# Altium PCB TactSwitch_PCB.PcbDoc
Units mm, origin at the board's own origin, x right, y up, seen from the top; angles counter-clockwise.
Board outline 18.5 x 44.9 mm, 2 copper layers (Top Layer, Bottom Layer), stack 1.571 mm thick; 4 components, 3 nets, 17 pads, 0 vias.
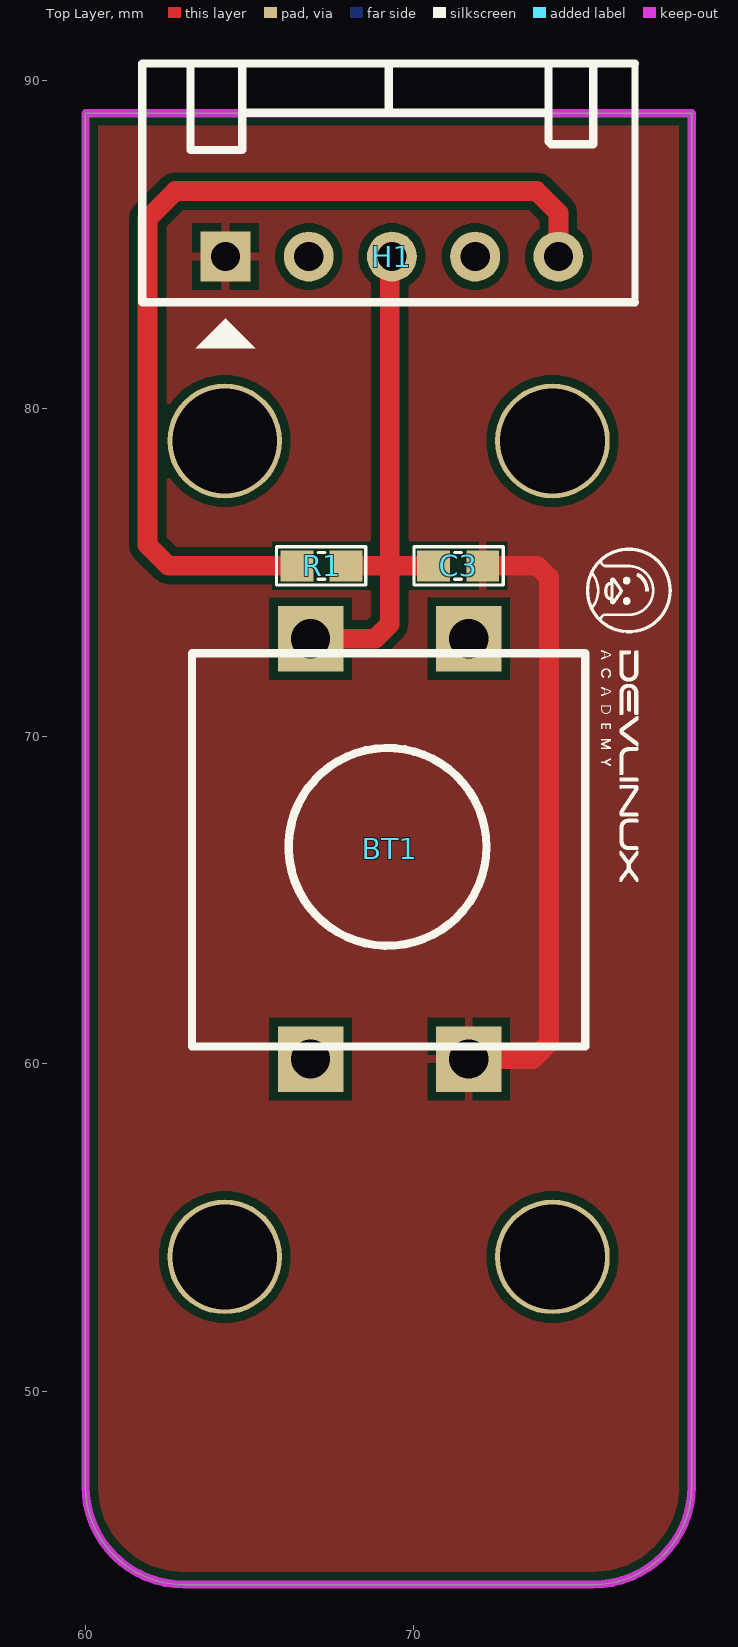
[diagram p0: Top Layer view]
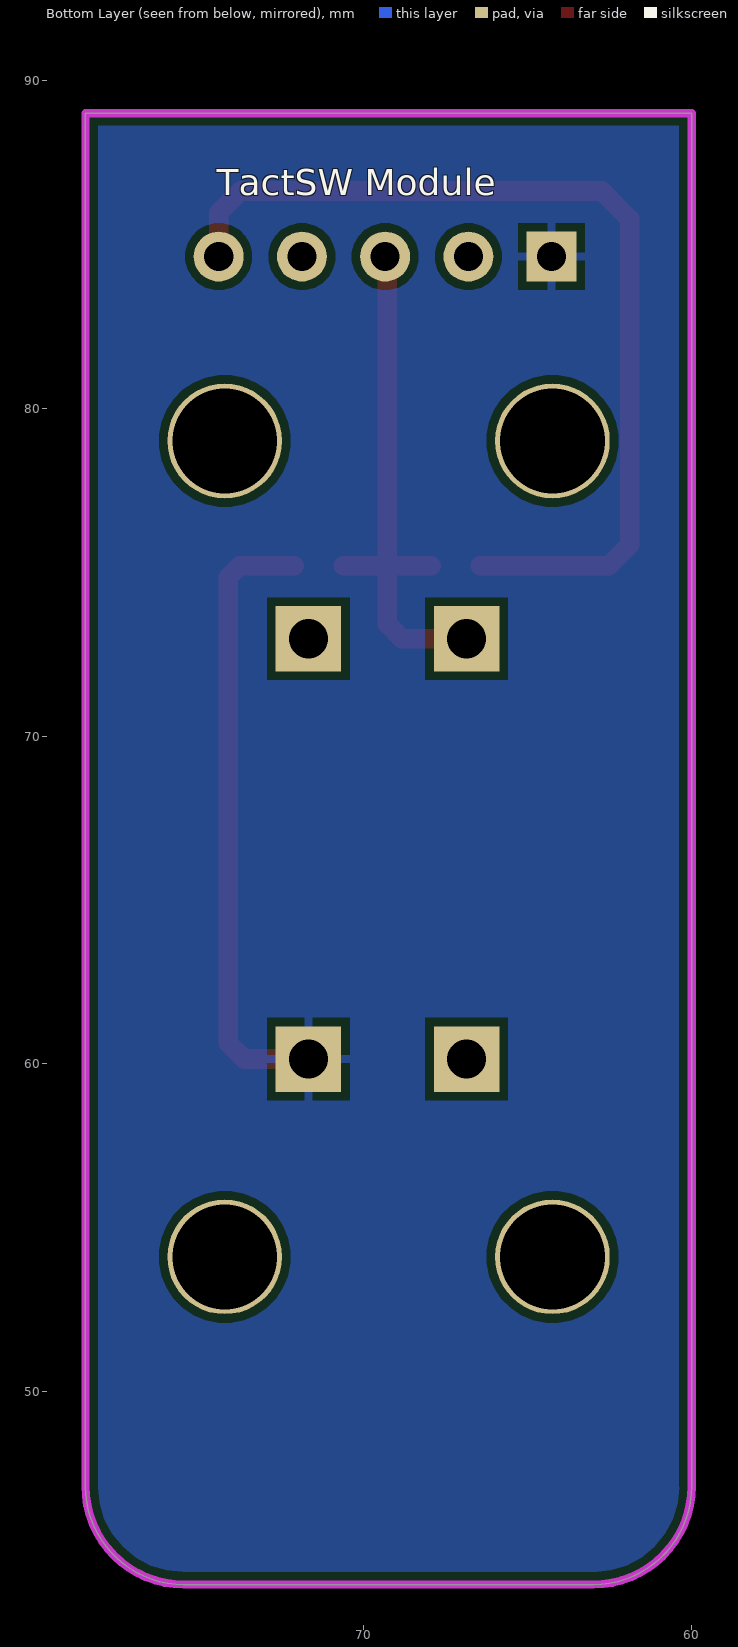
[diagram p1: Bottom Layer view, seen from below]
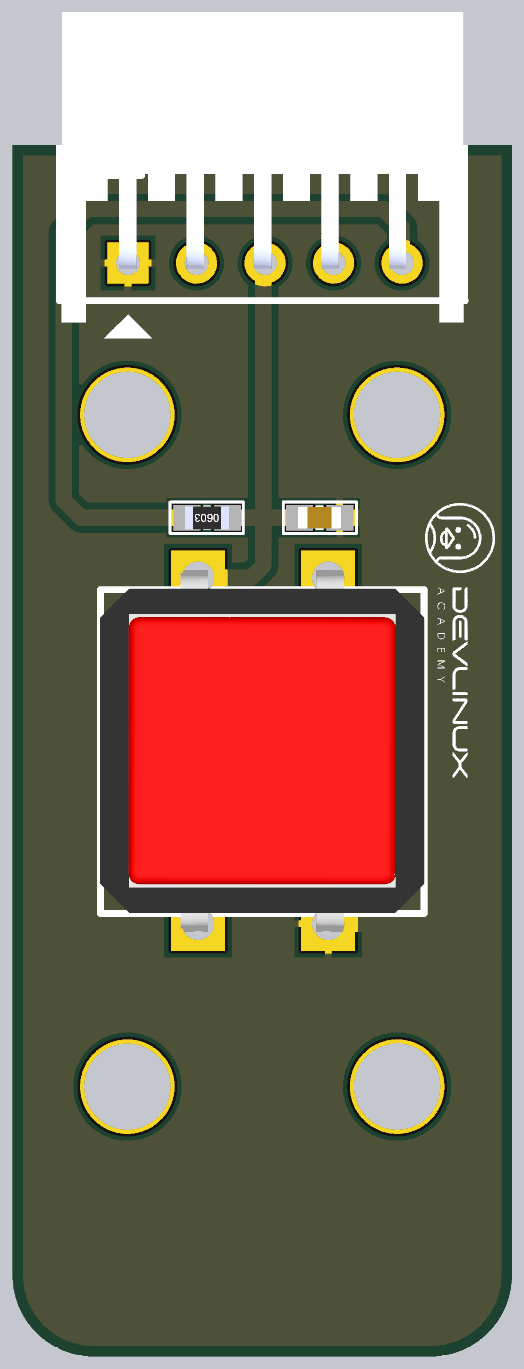
[diagram p2: 3D render of the assembled board from above, using the file's embedded part models]

## Layer stack, top to bottom
Top Solder: solder mask 0.0102, Solder Resist, Dk 3.5
Top Layer: signal copper 0.0356
Dielectric 1: dielectric 1.5, FR-4, Dk 4.8
Bottom Layer: signal copper 0.0356
Bottom Solder: solder mask 0.0102, Solder Resist, Dk 3.5

## Board outline
59.996,47.113 59.996,89.013 78.496,89.013 78.496,47.113 cw(c75.496,47.113) 75.496,44.113 62.996,44.113 cw(c62.996,47.113)

## Design rules (kind name [scope] priority, off if disabled: settings)
Clearance [All] p1: gap=0.254 ignorepadtopadclearanceinfootprint=FALSE except(0: Arc-Hole Track-Hole SMDPad-Hole THPad-Hole Via-Hole Fill-Hole Poly-Hole Region-Hole Text-Hole)
PolygonConnect [All] p1: connectstyle=Relief reliefconductorwidth=0.254 reliefentries=4 polygonreliefangle="90 Angle" airgapwidth=0.254
RoomDefinition TactSwitch_SCH [InComponentClass('TactSwitch_SCH')] p1: confinementstyle=ConfineIn formatcopy=TRUE lockcomponents=FALSE outline 178.943,26.797 223.139,26.797 223.139,57.912 178.943,57.912
RoutingVias [All] p1: holewidth=0.4 width=0.8 viastyle="Through Hole" minholewidth=0.3 minwidth=0.6 maxholewidth=0.5 maxwidth=1
SolderMaskExpansion [All] p1: expansion=0.102 istentingtop=FALSE
Width [All] p1: maxlimit=0.6 minlimit=0.254 preferedwidth=0.4
30 further rules are at their usual default settings.

## Components (designator, comment, footprint, x,y, rotation, side; value= is the part's Value field where it differs from the comment)
BT1 "TactSW WF" "12X12 BUTTOM red" 69.246,66.563 r90 top
C3 "100nF" "tu 0603" 71.37,75.2 r0 top
H1 "5P 2.54" "Header 5P DC 2.54" 64.27,84.64 r90 top
R1 "10k" "tro smd 0603" 67.2,75.2 r180 top

## Footprints (in the part's own frame and the unit in brackets; to place one, negate y for a bottom-side part, rotate by r counter-clockwise, add the part's x,y. Pads: shape width x height; smd on the part's side, far side on the other; paste and mask are expansions set on the pad)
"12X12 BUTTOM red" [mm]
  rect 2x2 hole 1.2: 1(-6.413,2.38) 2(-6.413,-2.446) 3(6.413,2.38) 4(6.413,-2.446)
  silkscreen extent -6.03,-6 5.97,6, body extent -6.71,-6.01 6.71,6.01, height 8.84
"Header 5P DC 2.54" [mil]
  rect 60x60 hole 35: 1(0,0)
  round 60 hole 35: 2(0,-100) 3(0,-200) 4(0,-300) 5(0,-400)
  silkscreen extent -110,-492 232,100, body extent -87,-490 366,97, height 240
"tro smd 0603" [mm] "Chip Capacitor, 2-Leads, Body 1,60x0,80mm, IPC Medium Density"
  rect 1x0.95 smd mask+0.076: 1(-0.75,0) 2(0.75,0)
  silkscreen extent -1.35,-0.58 1.37,0.58, body extent -0.82,-0.42 0.82,0.43, height 0.44
"tu 0603" [mm] "Chip Capacitor, 2-Leads, Body 1,60x0,80mm, IPC Medium Density"
  rect 1x0.95 smd mask+0.076: 1(-0.75,0) 2(0.75,0)
  silkscreen extent -1.35,-0.58 1.37,0.58, body extent -0.8,-0.4 0.8,0.4, height 0.9

## Part data
BT1: library part "Nut Nhan 4 chan 12x12", "WaterProof TactSW"
C3: library part "Tu 0603 104 50V 10%", "Dán", Chung_Loai=Dán, Don_Vi=Con, Ma_Hang=MH004568, So_Chan=2, Ten_Linh_Kien="Tụ 0603 104-100nF 10% 50V"
H1: library part "Header 5P 2.54 Duc Cong", "Cắm", Chung_Loai=Cắm, Don_Vi=Con, Ma_Hang=MH001308, Ten_Linh_Kien="Header 5P XH2.54-5P Đực Cong"
R1: library part "Tro 0603 1% 10k", "Dán", Chung_Loai=Dán, Don_Vi=Con, Ma_Hang=MH006333, So_Chan=2, Ten_Linh_Kien="Trở 0603 1% 10k"

## Free pads (board coordinates)
  round 3.5 hole 3.2: 6(64.246,54.113) 6(64.246,79.013) 6(74.246,54.113) 6(74.246,79.013)

## Nets (pads, with @x,y where several pads share a name; then routed paths per layer and width w, separated by ;. In a path a pad name is that pad's centre, name@x,y a point inside that pad or via, vN(x,y) a via of type N, cw(c..) or ccw(c..) an arc to the next point about the centre after c; other vN are vias at no path point)
+5: H1.5 R1.2 | length 29.3
  Top Layer w0.6: R1.2 62.53,75.2 61.89,75.84 61.89,85.79 62.74,86.64 73.76,86.64 74.43,85.97 H1.5
GND: BT1.2 C3.2 H1.1 | length 19
  Top Layer w0.6: BT1.2 73.649,60.15 74.14,60.64 74.14,74.849 73.789,75.2 C3.2
SW: BT1.3 C3.1 H1.3 R1.1 | length 16.5
  Top Layer w0.6: BT1.3 68.837,72.977 69.285,73.425 69.285,75.2 ; R1.1 69.285,75.2 ; H1.3 69.285,84.575 69.285,75.2 ; C3.1 69.285,75.2
pads on no net: BT1.1 BT1.4 H1.2 H1.4

## Polygon pours and split planes (outlines as drawn)
GND on Bottom Layer "GND_L02_P001" (solid, remove dead copper, pour order 1): 60.004,89.013 78.496,89.013 78.496,75.21 80.496,75.21 80.496,30.94 57.996,30.94 57.996,75.22 59.996,75.22
GND on Top Layer "GND_L01_P003" (solid, remove dead copper, pour order 3): 52.05,98.12 89.23,98.12 92.46,94.89 90.1,92.53 90.1,35.67 60.18,35.67 54.714,41.136

## Keep-outs
Keep-Out Layer:
  lines w0.254: 59.996,47.113 ccw(c62.996,47.113) 62.996,44.113 75.496,44.113 ccw(c75.496,47.113) 78.496,47.113 78.496,57.913 78.496,75.213 78.496,89.013 59.996,89.013 59.996,75.213 59.996,57.913 59.996,47.113

## Silkscreen, mask and mechanical layers (free items; w line width, h text height)
Top Overlay:
  drawing of 21 lines, arcs and shapes, not listed
Bottom Overlay:
  text "TactSW Module" at 74.49,86.51 h0.8